# Allegro board ex2_rlc.brd
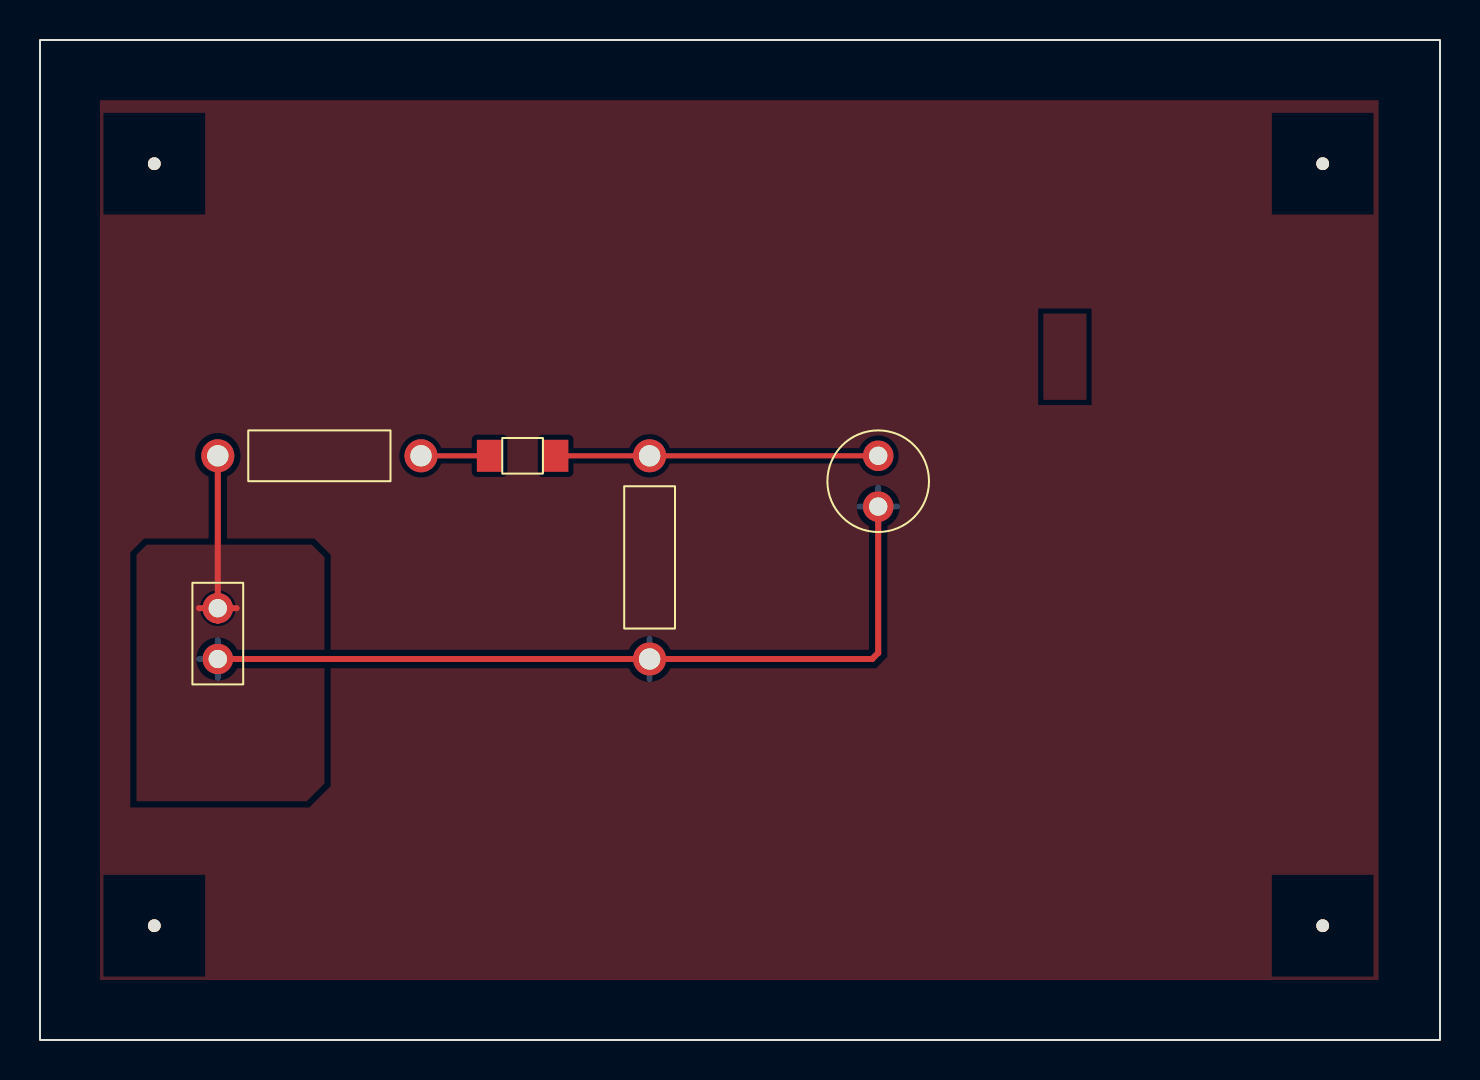
[diagram p0: board, top side]
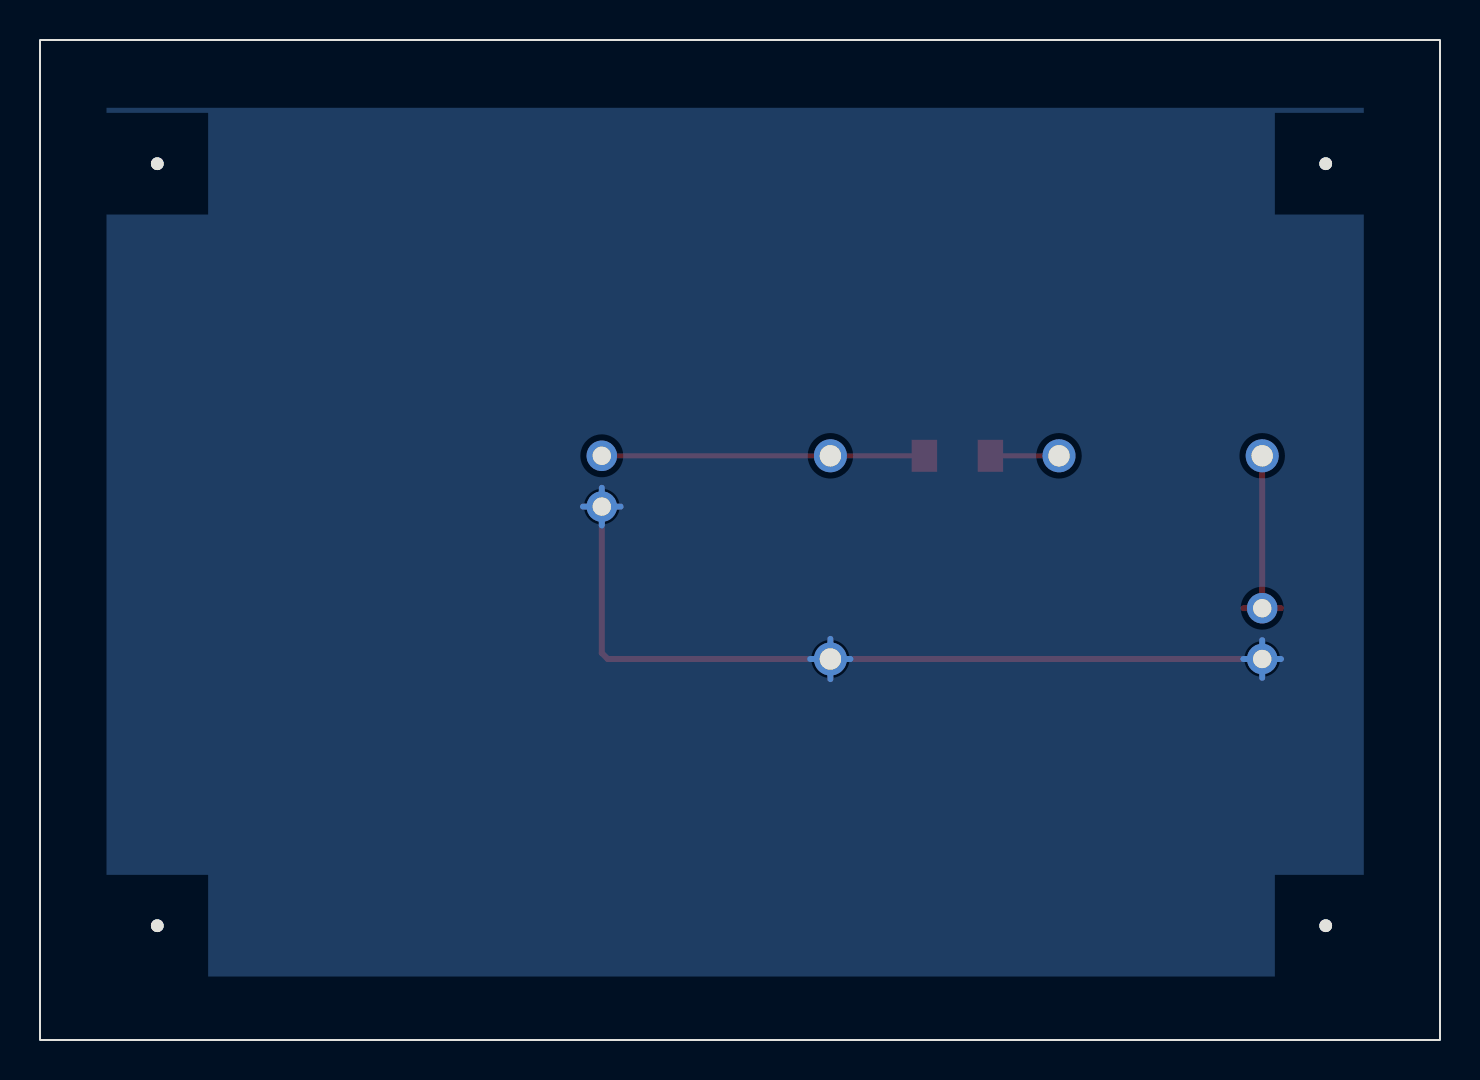
[diagram p1: board, bottom side, seen from below]

Outline 70 x 50 mm; copper layers: TOP, BOTTOM. Coordinates in mm from the lower left corner of the outline.
Outline path: rectangle 0,0 70,50

## Design rules (mm)
constraint set DEFAULT: min track width 0.254
net group BASENETS: nets KKK N00134

## Placement (name value [footprint] x y rotation side)
C1  1u  [CAP196]  41.91 26.67 0 top
J1  CON2  [JUMPER2]  8.89 21.59 270 top
L1  100n  [SMDRES]  24.13 29.21 0 top
NOREF  -  [unnamed]  64.14 43.81 0 top
NOREF#2  -  [unnamed]  64.14 5.71 0 top
NOREF#3  -  [unnamed]  5.71 5.71 0 top
NOREF#4  -  [unnamed]  5.71 43.81 0 top
R1  330  [RES400]  8.89 29.21 270 top
R2  330  [RES400]  30.48 29.21 180 top

## Library data of the parts
C1 = CAP NP: Tolerance: ***; User Part Number: ***
J1 = CON2: User Part Number: ***
L1 = INDUCTOR: Tolerance: ***; User Part Number: ***
R1 R2 = R: Tolerance: ***; User Part Number: ***

## Footprints (pads in the part's own frame, mm; a bottom-side part is the same pattern mirrored in y, then rotated)
CAP196
  round 1.524 hole 0.914: 1(0,0) 2(0,2.54)
JUMPER2
  round 1.524 hole 0.914: 1(0,0) 2(2.54,0)
RES400
  round 1.651 hole 1.067: 1(0,0) 2(0,10.16)
SMDRES
  rect 1.27x1.6 smd: 1(-1.651,0) 2(1.651,0)
unnamed
  round 0.635 hole 3.175 unplated: (0,0)

## Nets
GND: C1.1 J1.2 R2.2
VCC: J1.1 R1.1
KKK: L1.1 R1.2
N00134: C1.2 L1.2 R2.1

## Routing (per net, layer and track width the routed paths; a pad name or vN(x,y) marks a point on that pad's centre or on a via; arc(x,y) is an arc through that point)
GND: length 52
  TOP w0.3: C1.1 41.91,19.35 41.61,19.05 R2.2 J1.2
  BOTTOM w0.3: C1.1 42.85,26.67 ; C1.1 41.91,25.73 ; C1.1 40.97,26.67 ; C1.1 41.91,27.61 ; 7.95,19.05 J1.2 ; J1.2 8.89,19.99 ; J1.2 8.89,18.11 ; J1.2 9.83,19.05 ; R2.2 30.48,20.06 ; R2.2 31.49,19.05 ; R2.2 29.47,19.05 ; R2.2 30.48,18.04
VCC: length 10.1
  TOP w0.3: 7.95,21.59 J1.1 ; J1.1 R1.1 ; J1.1 9.83,21.59 ; J1.1 8.89,20.95
KKK: length 3.4
  TOP w0.254: L1.1 R1.2
N00134: length 16.1
  TOP w0.254: L1.2 R2.1 C1.2

## Copper pours and planes (outline as drawn; the poured copper is in the pictures)
GND on BOTTOM: 3.81,46.61 3.81,3.17 66.67,3.17 66.67,46.61
VCC on TOP: 5.33,24.77 13.59,24.77 14.22,24.13 14.22,12.83 13.34,11.94 4.83,11.94 4.83,24.26
Net_1 on TOP: 3,46.99 66.93,46.99 66.93,3 3,3
Net_2 on TOP: 52.32,32 52.32,36.32 50.16,36.32 50.16,32

## Text on the board
TOLERANCE_TOP: FIGURE | FINISHED_SIZE | 0.914 | 1.067 | 3.175 | DRILL CHART: TOP to BOTTOM | ALL UNITS ARE IN MILLIMETERS | PLATED | NON-PLATED | QTY | 4
